# Altium PCB PCB_MOD+Fmeter.PcbDoc
Units mm, origin at the board's own origin, x right, y up, seen from the top; angles counter-clockwise.
Board outline 100 x 50 mm, 2 copper layers (Top Layer, Bottom Layer), stack 1.571 mm thick; 10 components, 8 nets, 30 pads, 18 vias.
Unrouted connection lines stored in the file: 3.
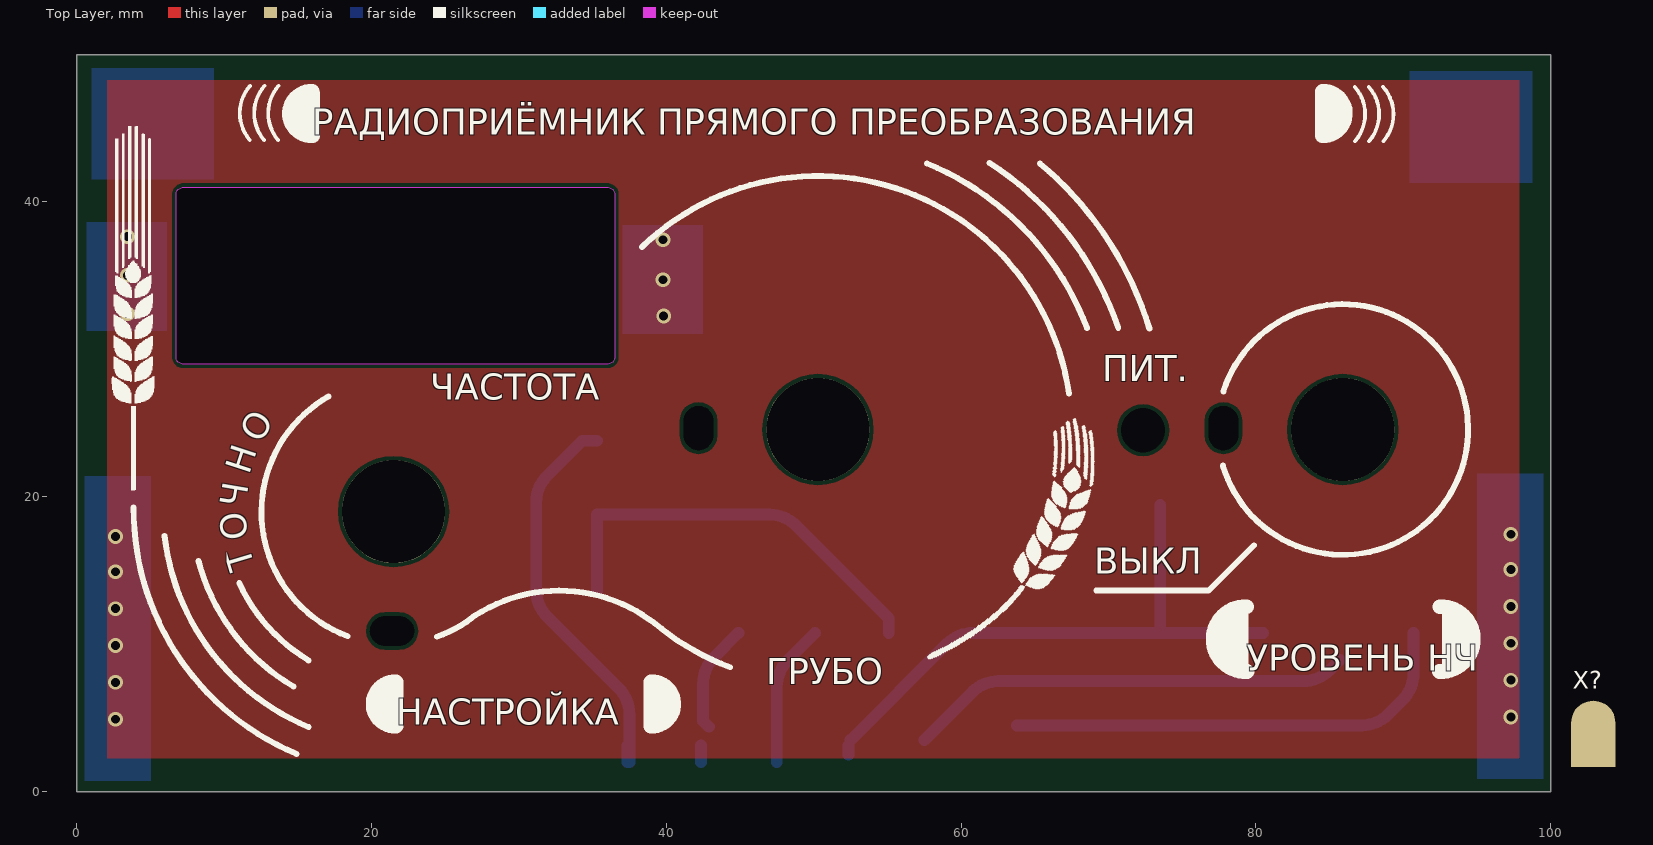
[diagram p0: Top Layer view]
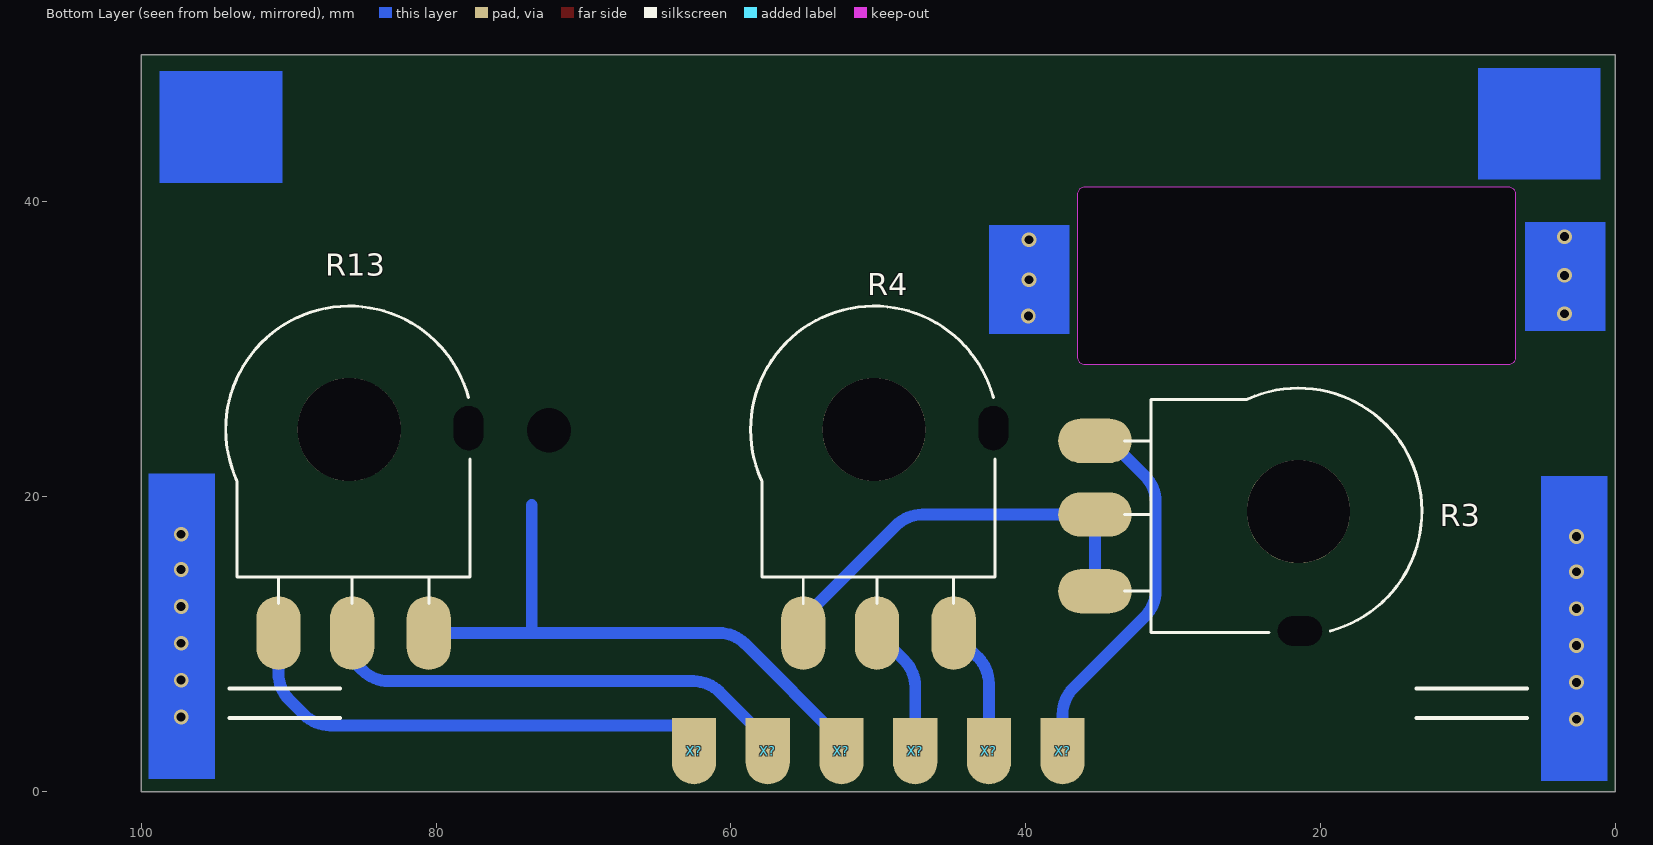
[diagram p1: Bottom Layer view, seen from below]
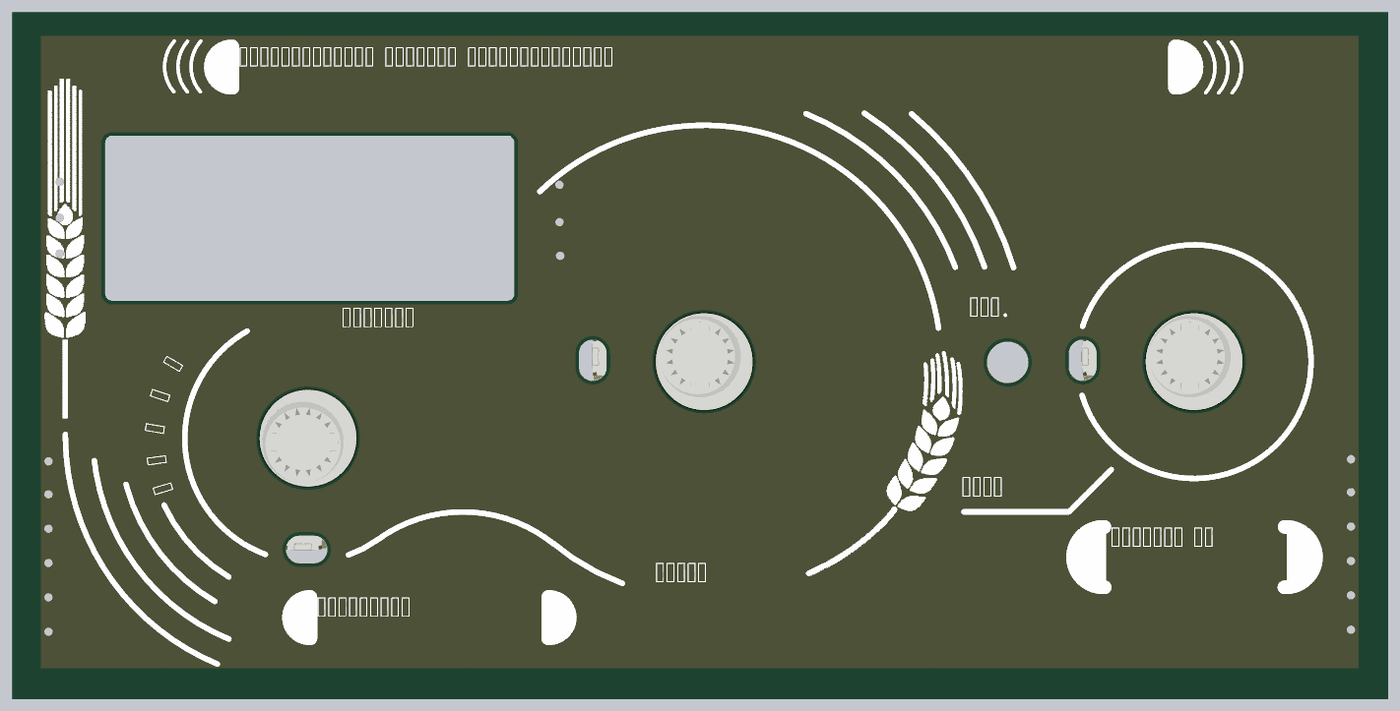
[diagram p2: 3D render of the assembled board from above, using the file's embedded part models]

## Layer stack, top to bottom
Top Solder: solder mask 0.0102, Solder Resist, Dk 3.5
Top Layer: signal copper 0.0356
Dielectric 1: dielectric 1.5, FR-4, Dk 4.8
Bottom Layer: signal copper 0.0356
Bottom Solder: solder mask 0.0102, Solder Resist, Dk 3.5

## Board outline
0,0 100,0 100,50 0,50
cut-out: 6.75,29.5 6.75,40.5 cw(c7.25,40.5) 7.25,41 36,41 cw(c36,40.5) 36.5,40.5 36.5,29.5 cw(c36,29.5) 36,29 7.25,29 cw(c7.25,29.5)

## Design rules (kind name [scope] priority, off if disabled: settings)
Clearance [All] p1: gap=0.254 ignorepadtopadclearanceinfootprint=FALSE except(0: Arc-Hole Track-Hole SMDPad-Hole THPad-Hole Via-Hole Fill-Hole Poly-Hole Region-Hole Text-Hole)
ComponentClearance [All] p1 off: gap=0.254 collisioncheckmode=3 verticalgap=0.254 showdistances=FALSE
PolygonConnect [All] p1: thpad.connectstyle=Relief thpad.reliefconductorwidth=0.254 thpad.reliefentries=4 thpad.polygonreliefangle="90 Angle" thpad.airgapwidth=0.254 smdpad.connectstyle=Relief smdpad.reliefconductorwidth=0.254 smdpad.reliefentries=4 smdpad.polygonreliefangle="90 Angle" smdpad.airgapwidth=0.254 via.connectstyle=Direct via.reliefconductorwidth=0.254 via.reliefentries=4 via.polygonreliefangle="90 Angle" via.airgapwidth=0.254
RoomDefinition Sheet2 [InComponentClass('Sheet2')] p1: confinementstyle=ConfineIn formatcopy=TRUE lockcomponents=FALSE outline 101.131,1.429 104.631,1.429 104.631,8.529 101.131,8.529
RoutingVias [All] p1: holewidth=0.711 width=1.27 viastyle="Through Hole" minholewidth=0.711 minwidth=1.27 maxholewidth=0.711 maxwidth=1.27
SolderMaskExpansion [All] p1: expansion=0.102 istentingtop=FALSE
Width [All] p1: maxlimit=2 minlimit=0.254 preferedwidth=0.254
29 further rules are at their usual default settings.

## Classes and differential pairs
component class Sheet2: R3 R13

## Components (designator, comment, footprint, x,y, rotation, side; value= is the part's Value field where it differs from the comment)
R3 "WH148" WH148R 21.5,19 r90 top
R4 "WH148" WH148R 50.289,24.568 r0 top
R13 "WH148" WH148R 85.889,24.568 r0 top
X? "SMT_Contact" SMT_CONTACT_TYPE_1 102.881,4.679 r0 top
X? "SMT_Contact" SMT_CONTACT_TYPE_1 47.5,2 r0 bottom
X? "SMT_Contact" SMT_CONTACT_TYPE_1 37.5,2 r0 bottom
X? "SMT_Contact" SMT_CONTACT_TYPE_1 52.5,2 r0 bottom
X? "SMT_Contact" SMT_CONTACT_TYPE_1 62.5,2 r0 bottom
X? "SMT_Contact" SMT_CONTACT_TYPE_1 42.5,2 r0 bottom
X? "SMT_Contact" SMT_CONTACT_TYPE_1 57.5,2 r0 bottom

## Footprints (in the part's own frame and the unit in brackets; to place one, negate y for a bottom-side part, rotate by r counter-clockwise, add the part's x,y. Pads: shape width x height; smd on the part's side, far side on the other; paste and mask are expansions set on the pad)
SMT_CONTACT_TYPE_1 [mm]
  rect 3x3 smd: 1(0,-1.5)
  round 3 smd: 1(0,0)
WH148R [mm]
  oval 3x5 smd far side: 1(4.8,-13.8) 2(-0.2,-13.8) 3(-5.4,-13.8)
  round 0 hole 3 slot 2 at 0 deg: HOLE(-8.1,0.1)
  round 7 hole 7: HOLE(0,0)
  body extent -8.17,-16.4 7.57,8.24, height 17.73

## Free pads (board coordinates)
  round 1.5 hole 3: 0(72.339,24.518)

## Via types
v1: diameter 1, hole 0.6, Top Layer to Bottom Layer, tented top, 18 vias

## Nets (pads, with @x,y where several pads share a name; then routed paths per layer and width w, separated by ;. In a path a pad name is that pad's centre, name@x,y a point inside that pad or via, vN(x,y) a via of type N, cw(c..) or ccw(c..) an arc to the next point about the centre after c; other vN are vias at no path point)
GND: R13.3 X?.1@52.5,2 X?.1@52.5,3.5 | length 45.4
  Bottom Layer w0.254: v1(39.77,37.438) v1@39.762,34.75 ; v1(39.773,34.723) v1@39.762,34.75 ; v1(39.823,32.273) v1@39.762,34.75
  Bottom Layer w0.8: X?.1@52.361,2.511 X?.1@52.361,3.132 ; X?.1@52.5,3.5 59.024,10.024 cw(c60.82,8.228) 60.82,10.768 73.5,10.768 ; 73.5,19.45 73.5,10.768 ; R13.3 73.5,10.768
  other v1: 2.639,4.918 97.289,5.068 2.639,7.418 97.289,7.568 2.639,9.918 97.289,10.068 2.639,12.418 97.289,12.568 2.639,14.918 97.289,15.068 2.639,17.318 97.289,17.468 3.45,32.425 3.45,35.025 3.45,37.65
NetR3_1: R3.1 X?.1@37.5,2 X?.1@37.5,3.5 | length 27.5
  Bottom Layer w0.8: R3.1 34.3,23.8 31.919,21.419 ccw(c33.715,19.623) 31.175,19.623 31.175,13.677 ccw(c33.715,13.677) 31.919,11.881 36.756,7.044 cw(c34.96,5.248) 37.5,5.248 37.5,3.5 X?.1@37.5,2 ; X?.1@37.361,2 X?.1@37.361,3.132
NetR3_2: R3.2 X?.1@102.881,3.179 X?.1@102.881,4.679 | length 28.8
  Bottom Layer w0.8: 35.3,13.6 R3.2 47.005,18.8 cw(c47.005,16.26) 48.801,18.056 55.089,11.768 55.089,10.768
NetR3_3: R3.3 R4.1
NetR4_2: R4.2 X?.1@47.5,2 X?.1@47.5,3.5 | length 9.7
  Bottom Layer w0.8: X?.1@47.5,2 47.5,3.5 47.5,7.127 cw(c50.04,7.127) 48.244,8.923 R4.2
NetR4_3: R4.3 X?.1@42.5,2 X?.1@42.5,3.5 | length 8.5
  Bottom Layer w0.8: X?.1@42.361,2 X?.1@42.361,3.132 ; X?.1@42.889,4.4 42.5,4.789 42.5,7.327 cw(c45.04,7.327) 43.244,9.123 R4.3
NetR13_1: R13.1 X?.1@62.5,2 X?.1@62.5,3.5 | length 31.5
  Bottom Layer w0.8: X?.1@63.778,4.5 87.169,4.5 ccw(c87.169,7.04) 88.965,5.244 89.945,6.224 ccw(c88.149,8.02) 90.689,8.02 R13.1
NetR13_2: R13.2 X?.1@57.5,2 X?.1@57.5,3.5 | length 30.2
  Bottom Layer w0.8: X?.1@57.5,3.5 60.756,6.756 cw(c62.552,4.96) 62.552,7.5 83.198,7.5 ccw(c83.198,10.04) 84.994,8.244 R13.2@85.689,8.939
pads on no net: R3.HOLE R4.HOLE R13.HOLE

## Polygon pours and split planes (outlines as drawn)
GND on Top Layer "Top Layer-GND 1" (solid, pour order 2): 2.089,48.268 2.089,2.268 97.85,2.268 97.85,48.268

## Other copper
Bottom Layer:
  region: 0.999,49.105 0.999,41.53 9.324,41.53 9.324,49.105
  region: 90.42,48.879 90.42,41.304 98.745,41.304 98.745,48.879
  region net GND: 99.489,21.568 94.989,21.568 94.989,0.868 99.489,0.868
  region net GND: 5.039,21.418 0.539,21.418 0.539,0.718 5.039,0.718
  region net GND: 0.675,38.65 0.675,31.25 6.15,31.25 6.15,38.65
  region net GND: 37.025,38.45 37.025,31.05 42.5,31.05 42.5,38.45

## Silkscreen, mask and mechanical layers (free items; w line width, h text height)
Top Overlay:
  drawing of 2405 lines, arcs and shapes, not listed
  text "РАДИОПРИЁМНИК ПРЯМОГО ПРЕОБРАЗОВАНИЯ" at 16,44 h3
  text "ПИТ." at 69.589,27.268 h3
  text "ЧАСТОТА" at 24,26 h3
  text "О" at 12.975,23.25 h3 r59.51
  text "Н" at 12.25,21.25 h3 r71.91
  text "Ч" at 11.975,19.075 h3 r80.35
  text "О" at 12.225,17.275 h3 r97.74
  text "Т" at 12.675,15.475 h3 r106.7
  text "ВЫКЛ" at 69.039,14.193 h3
  text "УРОВЕНЬ НЧ" at 79.383,7.644 h3
  text "ГРУБО" at 46.775,6.725 h3
  text "НАСТРОЙКА" at 21.675,3.95 h3
Bottom Overlay:
  lines w0.254: 6,5 13.5,5 ; 6,7 13.5,7 ; 86.5,5 94,5 ; 86.5,7 94,7
Mechanical 13:
  lines w0.01: 7.074,41 ccw(c7.074,40.676) 6.75,40.676 6.75,29.325 ; 7.077,41 36.176,41 cw(c36.176,40.676) 36.5,40.676 36.5,29.3 cw(c36.2,29.3) 36.2,29 7.075,29 ; 7.225,29 7.075,29 ; 6.75,29.325 ccw(c7.075,29.325) 7.075,29 ; 6.75,29.325 6.75,29.325 ; 0,0 0,50 100,50 100,0 0,0